# Altium PCB ЦТЕА4.324.039-1.PcbDoc (part 1 of 2)
Units mm, origin at the board's own origin, x right, y up, seen from the top; angles counter-clockwise.
Board outline 257.3 x 114.8 mm, 4 copper layers (Top Layer, Mid-Layer 1, Internal Plane 1, Bottom Layer); 126 components, 114 nets, 540 pads, 161 vias.
Unrouted connection lines stored in the file: 1.
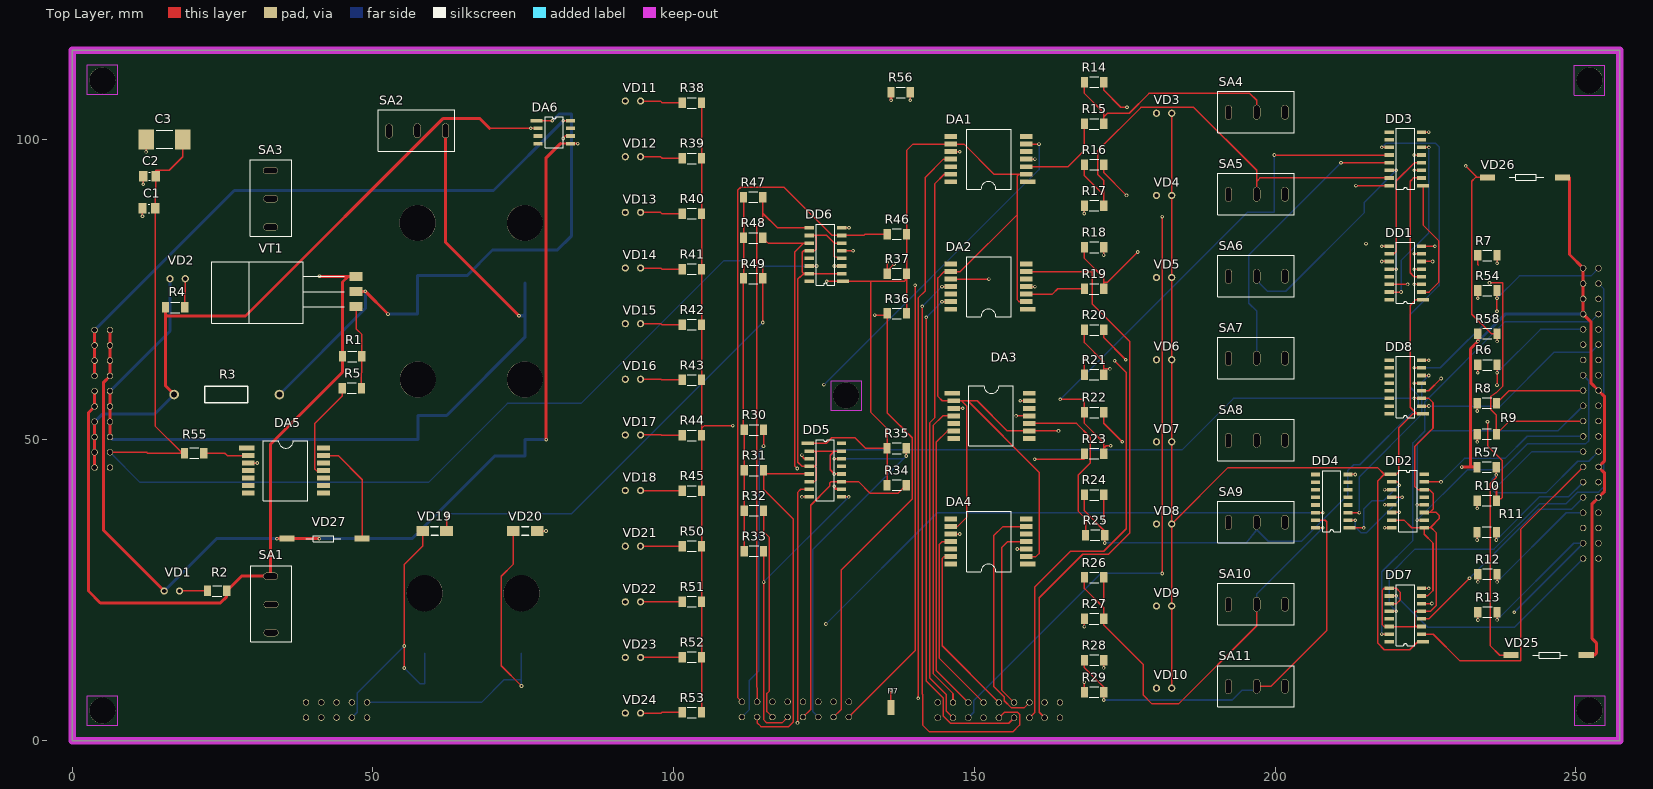
[diagram p0: Top Layer view]
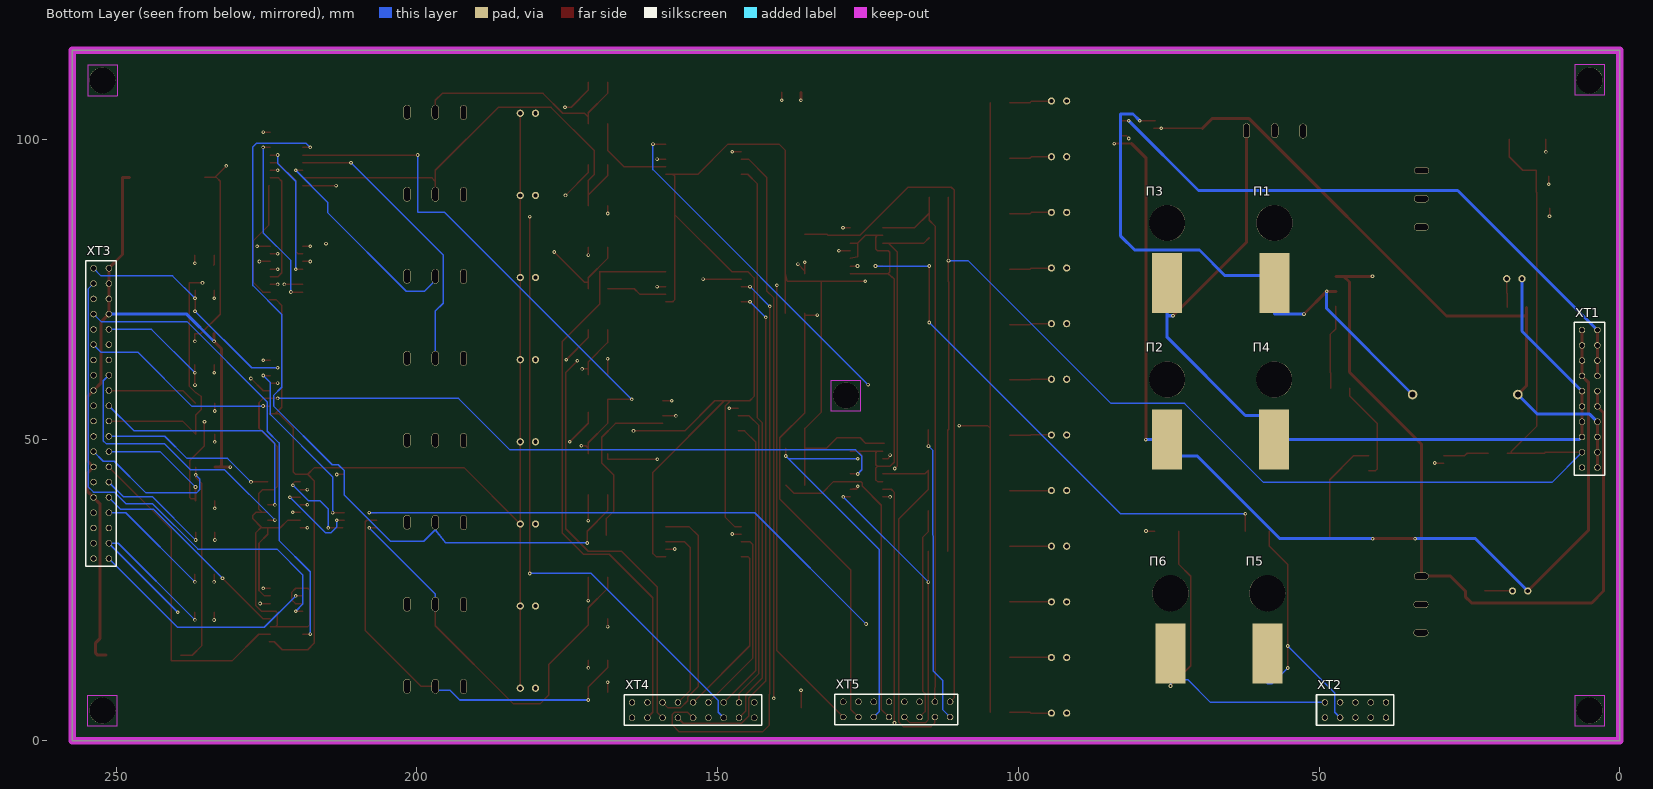
[diagram p1: Bottom Layer view, seen from below]
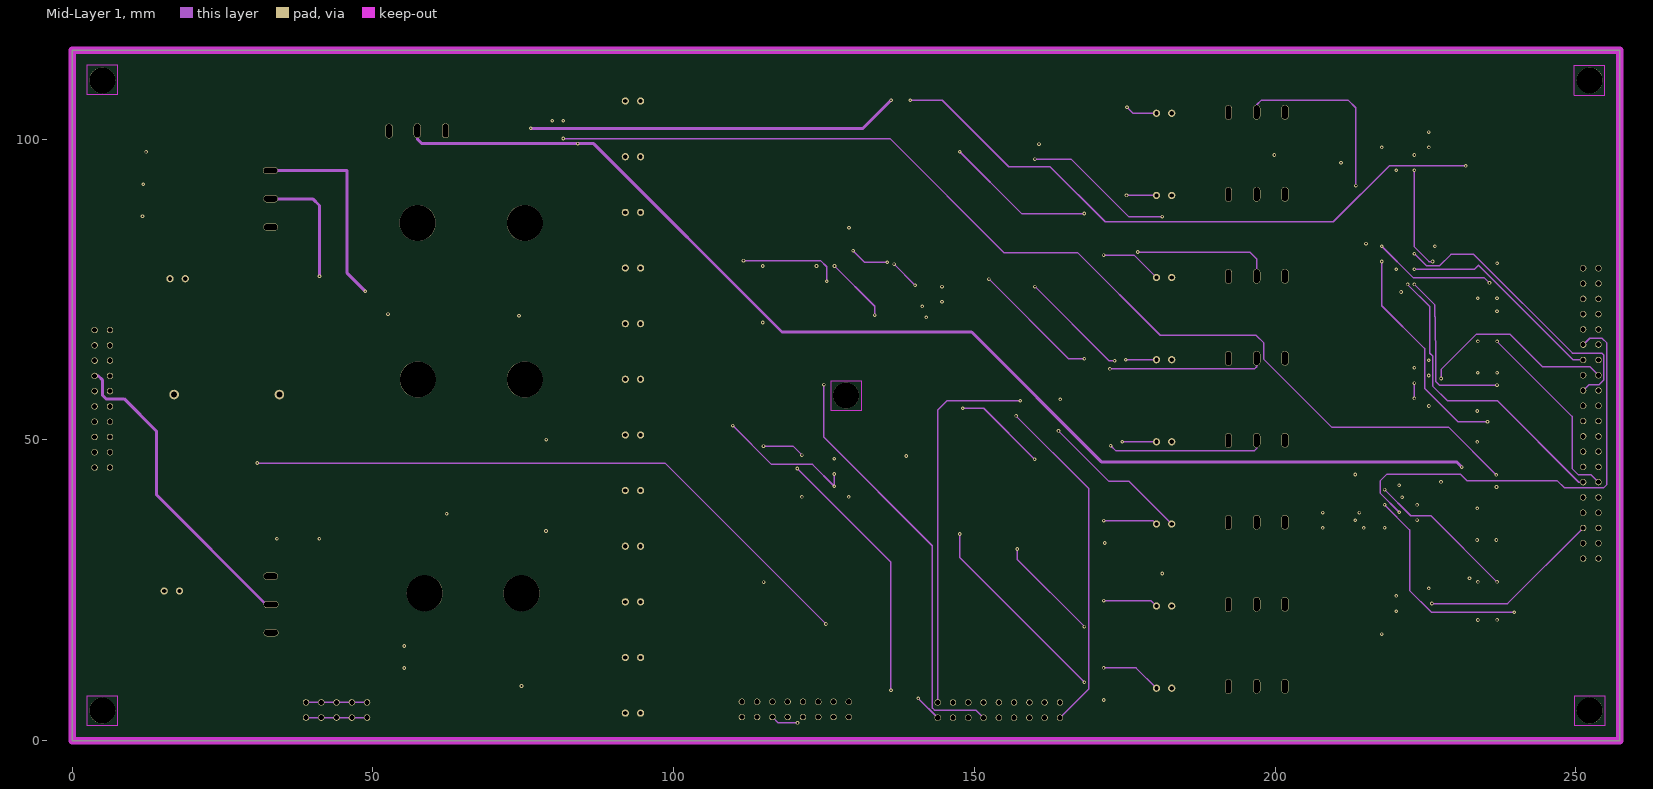
[diagram p2: Mid-Layer 1]
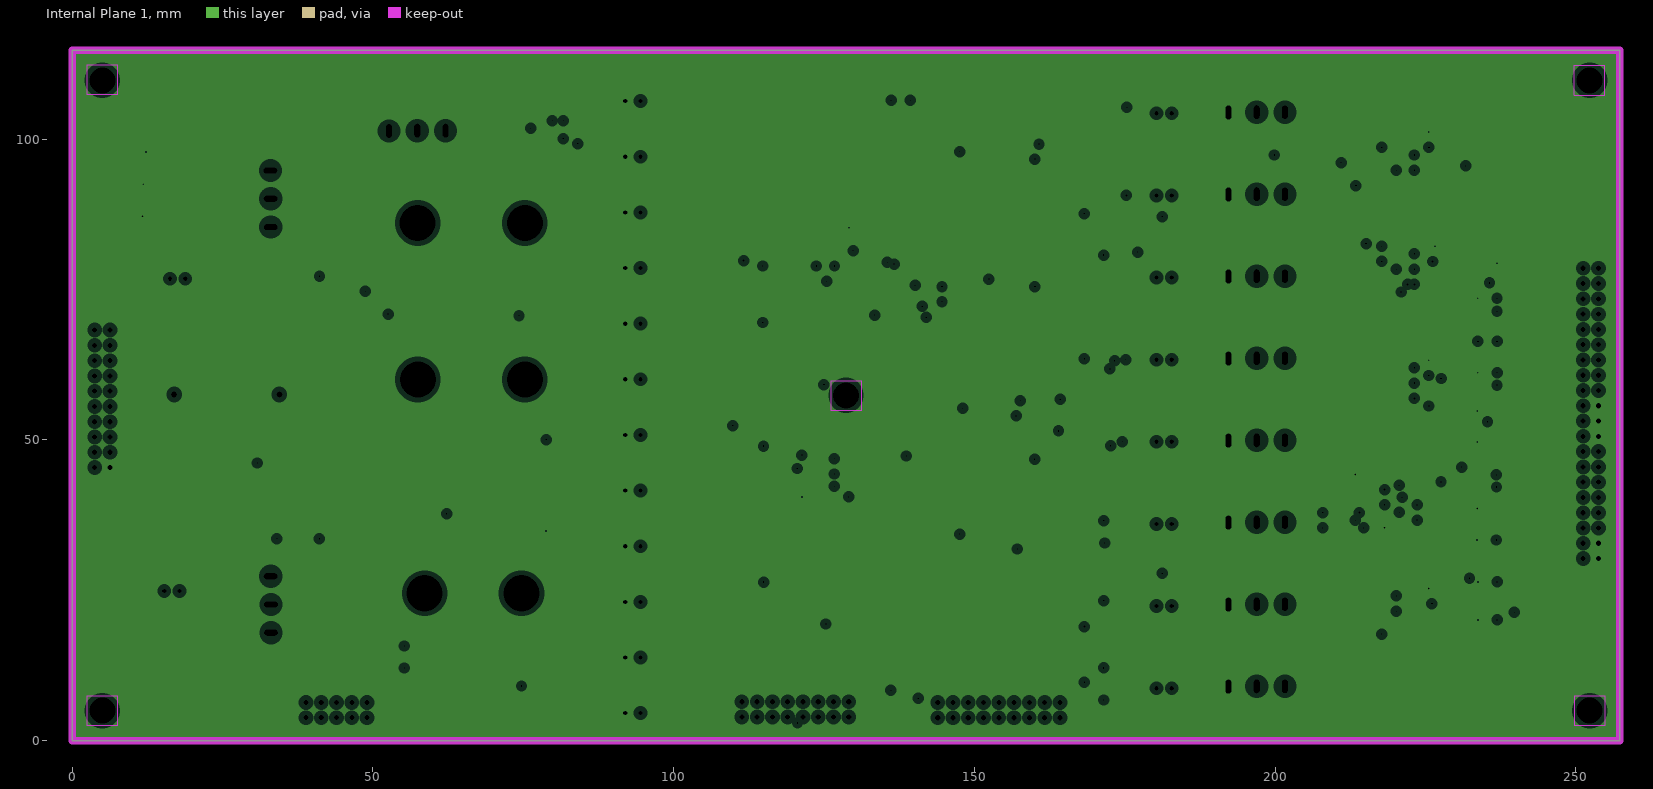
[diagram p3: Internal Plane 1, clearances drawn from the general rule]

## Layer stack, top to bottom
Top Layer: signal copper 0.0356
Dielectric: core 0.32, FR-4, Dk 4.8
Mid-Layer 1: signal copper 0.0356
Dielectric: prepreg 0.32, FR-4, Dk 4.8
Internal Plane 1: plane copper 0.0356, net GND
Dielectric: core 0.32, FR-4, Dk 4.8
Bottom Layer: signal copper 0.0356

## Board outline
0,114.8 0,0 257.3,0 257.3,114.8

## Design rules (kind name [scope] priority, off if disabled: settings)
Clearance [All] p1: gap=0.25
Height [All] p1: minheight=0 maxheight=60 prefheight=12.7
HoleSize [All] p1: absolutevalues=TRUE maxlimit=6 minlimit=0.025 maxpercent=80.000 minpercent=20.000
PlaneClearance [All] p1: clearance=0.8
PlaneConnect [All] p1: planeconnectstyle=Relief reliefexpansion=0.508 reliefentries=4 reliefconductorwidth=0.6 reliefairgap=0.254
PolygonConnect [All] p1: connectstyle=Relief reliefconductorwidth=0.254 reliefentries=4 polygonreliefangle="90 Angle"
RoutingVias [All] p1: holewidth=0.3 width=0.6 viastyle="Through Hole" minholewidth=0.3 minwidth=0.6 maxholewidth=0.3 maxwidth=0.6
SMDNeckDown [All] p1: percent=50.000
SMDToCorner [All] p1: distance=787402
SilkscreenOverComponentPads [All] p1: minsilkscreentomaskgap=0.254
SolderMaskExpansion [All] p1: expansion=0.102
Width +(-)27B [InNetClass('+(-)27В')] p1: maxlimit=0.5 minlimit=0.5 preferedwidth=0.5
Width [All] p2: maxlimit=0.25 minlimit=0.25 preferedwidth=0.25
23 further rules are at their usual default settings.

## Classes and differential pairs
net class +(-)27В: +27В +27В_кам_RS+ +27В_кам_RS- +27В_пульт -27В -27В_камера
component class ЦТЕА4.324.039_Э3_3: DA5 DA6 DD5 DD6 DD7 DD8 R30 R31 R32 R33 R34 R35 R36 R37 R38 R39 R40 R41 R42 R43 R44 R45 R46 R47 R48 R49 R50 R51 R52 R53 R54 R55 R56 R57 R58 VD11 VD12 VD13 VD14 VD15 VD16 VD17 VD18 VD19 VD20 VD21 VD22 VD23 VD24 VD25 VD26 VD27 XT3 XT5 П7
component class ЦТЕА4.324.039_Э3_1: C1 C2 C3 R1 R2 R3 R4 R5 SA1 SA2 SA3 VD1 VD2 VT1 XT1 XT2 П1 П2 П3 П4 П5 П6
component class ЦТЕА4.324.039_Э3_2: DA1 DA2 DA4 DD1 DD3 DD4 R6 R7 R8 R9 R10 R11 R12 R13 R14 R15 R16 R17 R18 R19 R20 R21 R22 R23 R24 R25 R26 R27 R28 R29 SA4 SA5 SA6 SA7 SA8 SA9 SA10 SA11 VD3 VD4 VD5 VD6 VD7 VD8 VD9 VD10 XT4

## Components (designator, comment, footprint, x,y, rotation, side; value= is the part's Value field where it differs from the comment)
C1 "1uF" GRM21BR61E105KA01K 12.727,88.519 r0 top
C2 "1uF" GRM21BR61E105KA01K 12.855,93.855 r0 top
C3 "47uF" TAJV686MO35RNJ 15.327,99.972 r180 top
DA1 "249КП1С" 249KP1S-44_3208_125_12 152.465,96.697 r180 top
DA2 "249КП1С" 249KP1S-44_3208_125_12 152.465,75.502 r180 top
DA3 "249КП1С" 249KP1S-44_3208_125_12 152.715,54.01 r0 top
DA4 "249КП1С" 249KP1S-44_3208_125_12 152.465,33.111 r180 top
DA5 "249КП1С" 249KP1S-44_3208_125_12 35.389,44.915 r0 top
DA6 "MAX4172" MAX4172 80.035,101.183 r0 top
DD1 "Mikroshema" CD4050BD 221.764,77.781 r180 top
DD2 "Mikroshema" CD4050BD 221.989,39.852 r0 top
DD3 "Mikroshema" UL2004AD 221.764,96.745 r180 top
DD4 "Mikroshema" UL2004AD 209.524,39.824 r180 top
DD5 "CD4049" CD4049UBD 125.102,44.984 r0 top
DD6 "CD4049" CD4049UBD 125.353,80.83 r180 top
DD7 "Mikroshema" CD4050BD 221.764,20.887 r180 top
DD8 "Mikroshema" CD4050BD 221.764,58.816 r180 top
R1 "Res" CR1206-JW-8250ELF 44.951,63.893 r0 top
R2 "Res" CR1206-JW-4701ELF 25.681,24.894 r180 top
R3 "Res" KNP100JTB0R1-1_0000_175 16.942,57.56 r0 top
R4 "Res" CR1206-JW-4701ELF 15.503,72.04 r0 top
R5 "Res" CR1206-JW-1001ELF 48.09,58.618 r180 top
R6 "Res" CR1206-JW-3301ELF 233.706,62.481 r0 top
R7 "Res" CR1206-JW-3301ELF 236.907,80.678 r180 top
R8 "Res" CR1206-JW-3301ELF 233.617,56.119 r0 top
R9 "Res" CR1206-JW-3301ELF 233.6,50.98 r0 top
R10 "Res" CR1206-JW-3301ELF 233.61,39.921 r0 top
R11 "Res" CR1206-JW-3301ELF 233.586,34.667 r0 top
R12 "Res" CR1206-JW-3301ELF 233.709,27.712 r0 top
R13 "Res" CR1206-JW-3301ELF 233.709,21.377 r0 top
R14 "Res" CR1206-JW-4700ELF 168.292,109.498 r0 top
R15 "Res" CR1206-JW-3300ELF 171.492,102.551 r180 top
R16 "Res" CR1206-JW-4700ELF 168.292,95.771 r0 top
R17 "Res" CR1206-JW-3300ELF 171.492,88.974 r180 top
R18 "Res" CR1206-JW-4700ELF 168.292,82.045 r0 top
R19 "Res" CR1206-JW-3300ELF 171.492,75.132 r180 top
R20 "Res" CR1206-JW-4700ELF 168.292,68.319 r0 top
R21 "Res" CR1206-JW-3300ELF 171.492,60.876 r180 top
R22 "Res" CR1206-JW-4700ELF 168.292,54.593 r0 top
R23 "Res" CR1206-JW-3300ELF 171.492,47.73 r180 top
R24 "Res" CR1206-JW-4700ELF 168.292,40.868 r0 top
R25 "Res" CR1206-JW-3300ELF 171.673,34.18 r180 top
R26 "Res" CR1206-JW-4700ELF 168.292,27.14 r0 top
R27 "Res" CR1206-JW-3300ELF 171.492,20.277 r180 top
R28 "Res" CR1206-JW-4700ELF 168.292,13.414 r0 top
R29 "Res" CR1206-JW-3300ELF 171.492,8.069 r180 top
R30 "Res" CR1206-JW-3301ELF 111.738,51.692 r0 top
R31 "Res" CR1206-JW-3301ELF 111.738,44.966 r0 top
R32 "Res" CR1206-JW-3301ELF 111.738,38.24 r0 top
R33 "Res" CR1206-JW-3301ELF 111.738,31.514 r0 top
R34 "Res" CR1206-JW-3301ELF 135.471,42.506 r0 top
R35 "Res" CR1206-JW-3301ELF 135.471,48.626 r0 top
R36 "Res" CR1206-JW-3301ELF 138.717,71.038 r180 top
R37 "Res" CR1206-JW-3301ELF 138.717,77.639 r180 top
R38 "Res" CR1206-JW-4700ELF 104.628,106.051 r180 top
R39 "Res" CR1206-JW-4700ELF 104.628,96.837 r180 top
R40 "Res" CR1206-JW-4700ELF 104.628,87.623 r180 top
R41 "Res" CR1206-JW-4700ELF 104.628,78.409 r180 top
R42 "Res" CR1206-JW-4700ELF 104.628,69.194 r180 top
R43 "Res" CR1206-JW-4700ELF 104.628,59.98 r180 top
R44 "Res" CR1206-JW-4700ELF 104.628,50.766 r180 top
R45 "Res" CR1206-JW-4700ELF 104.628,41.552 r180 top
R46 "Res" CR1206-JW-3301ELF 138.717,84.24 r180 top
R47 "Res" CR1206-JW-3301ELF 111.616,90.388 r0 top
R48 "Res" CR1206-JW-3301ELF 111.616,83.622 r0 top
R49 "Res" CR1206-JW-3301ELF 111.616,76.856 r0 top
R50 "Res" CR1206-JW-4700ELF 104.628,32.337 r180 top
R51 "Res" CR1206-JW-4700ELF 104.628,23.123 r180 top
R52 "Res" CR1206-JW-4700ELF 104.628,13.909 r180 top
R53 "Res" CR1206-JW-4700ELF 104.628,4.695 r180 top
R54 "Res" CR1206-JW-4701ELF 236.889,74.857 r180 top
R55 "Res" CR1206-JW-3300ELF 18.677,47.811 r0 top
R56 "Res" CR1206-JW-4701ELF 136.147,107.795 r0 top
R57 "Res" CR1206-JW-1001ELF 233.584,45.497 r0 top
R58 "Res" CR1206-JW-4700ELF 236.909,67.701 r180 top
SA1 "\"Питание пульта\"" 7107SYZQE 33.049,17.953 r0 top
SA2 "\"Измерение тока\"" 7107SYZQE 62.062,101.423 r90 top
SA3 "\"Питание камеры\"" 7107SYZQE 32.993,85.402 r0 top
SA4 "\"1\"" 7107SYZQE 201.635,104.501 r90 top
SA5 "\"2\"" 7107SYZQE 201.635,90.864 r90 top
SA6 "\"3\"" 7107SYZQE 201.635,77.227 r90 top
SA7 "\"4\"" 7107SYZQE 201.635,63.59 r90 top
SA8 "\"5\"" 7107SYZQE 201.635,49.953 r90 top
SA9 "\"6\"" 7107SYZQE 201.635,36.316 r90 top
SA10 "\"7\"" 7107SYZQE 201.635,22.679 r90 top
SA11 "\"8\"" 7107SYZQE 201.635,9.041 r90 top
VD1 "LED" HLMP-D150 17.826,24.9 r180 top
VD2 "LED" HLMP-D150 18.788,76.813 r180 top
VD3 "\"Out1\"" HLMP-D150 182.806,104.326 r180 top
VD4 "\"Out2\"" HLMP-D150 182.806,90.668 r180 top
VD5 "\"Out3\"" HLMP-D150 182.806,77.011 r180 top
VD6 "\"Out4\"" HLMP-D150 182.806,63.354 r180 top
VD7 "\"Out5\"" HLMP-D150 182.806,49.697 r180 top
VD8 "\"Out6\"" HLMP-D150 182.806,36.04 r180 top
VD9 "\"Out7\"" HLMP-D150 182.806,22.383 r180 top
VD10 "\"Out8\"" HLMP-D150 182.806,8.726 r180 top
VD11 "\"1\"" HLMP-D150 94.499,106.35 r180 top
VD12 "\"2\"" HLMP-D150 94.499,97.098 r180 top
VD13 "\"3\"" HLMP-D150 94.499,87.847 r180 top
VD14 "\"4\"" HLMP-D150 94.499,78.595 r180 top
VD15 "\"5\"" HLMP-D150 94.499,69.344 r180 top
VD16 "\"6\"" HLMP-D150 94.499,60.092 r180 top
VD17 "\"7\"" HLMP-D150 94.499,50.841 r180 top
VD18 "\"8\"" HLMP-D150 94.499,41.589 r180 top
VD19 "Schottky" 10MQ060N 60.26,34.867 r180 top
VD20 "Schottky" 10MQ060N 75.317,34.867 r0 top
VD21 "\"9\"" HLMP-D150 94.499,32.338 r180 top
VD22 "\"10\"" HLMP-D150 94.499,23.086 r180 top
VD23 "\"11\"" HLMP-D150 94.499,13.835 r180 top
VD24 "\"КПС\"" HLMP-D150 94.499,4.583 r180 top
VD25 "9В" 1N4754A-25_0000_145_18 245.483,14.21 r180 top
VD26 "9В" 1N4754A-25_0000_145_18 241.544,93.663 r180 top
VD27 "9В" 1N4754A-25_0000_145_18 41.955,33.587 r0 top
VT1 "IRF4905PBF" IRF4905PBF-f1 47.198,72.21 r90 top
XT1 "1 +27В" PLD-20 3.726,68.277 r270 bottom
XT2 "1 КПС-1" PLD-10 38.862,3.829 r0 bottom
XT3 "1 Общ" PLD-40 251.224,78.547 r270 bottom
XT4 "1 opt_out1+" PLD-18 143.901,3.819 r0 bottom
XT5 "1 ТМ1" PLD-16 111.335,3.928 r0 bottom
П1 "\"+U_кам\"" ZMP 57.422,86.077 r180 bottom
П2 "\"-I_кам\"" ZMP 75.245,60.064 r180 bottom
П3 "\"-U_кам.\"" ZMP 75.245,86.077 r180 bottom
П4 "\"+I_кам.\"" ZMP 57.452,60.064 r180 bottom
П5 "\"КПС-1\"" ZMP 58.591,24.51 r180 bottom
П6 "\"КПС-2\"" ZMP 74.694,24.51 r180 bottom
П7 "" Pad 136.126,5.504 r0 top

## Footprints (in the part's own frame and the unit in brackets; to place one, negate y for a bottom-side part, rotate by r counter-clockwise, add the part's x,y. Pads: shape width x height; smd on the part's side, far side on the other; paste and mask are expansions set on the pad)
1N4754A-25_0000_145_18 [mm] "Диод 1N4754A. Diodes INCORPORATED.  Формовка 25.0000.145.12 по ОСТ92-9388-98.Класс точности 3"
  rect 2.5x1 smd: 1(-6.25,0) 2(6.25,0)
  silkscreen extent -3.1,-0.5 2.65,0.5
10MQ060N [mm] "Диод 10MQ060N.International Rectifier. Класс точности 3"
  rect 2.1x1.7 smd: 1(-1.975,0) 2(1.975,0)
  silkscreen extent -0.6,-0.71 0.61,0.73
249KP1S-44_3208_125_12 [mm] "Микросхема 249КП1С, 1Х3.438.000 ТУ. Формовка 44.3208.125.12 по ОСТ92-9388-98. Класс точности 3."
  rect 2.6x0.8 smd: 1(-6.375,3.75)
  rect 2.1x0.8 smd: 2(-6.125,2.5) 3(-6.125,1.25) 4(-6.125,0) 5(-6.125,-1.25) 6(-6.125,-2.5) 7(-6.125,-3.75) 8(6.375,-3.75) 9(6.375,-2.5) 10(6.375,-1.25) 11(6.375,0) 12(6.375,1.25) 13(6.375,2.5) 14(6.375,3.75)
  silkscreen extent -3.67,-5 3.77,5
7107SYZQE [mm] "Переключатель 7107SYZQE. ITT Cannon Класс точности 3"
  rrect100% 2.45x1.2 hole 0.95 slot 2.25 at 0 deg: 1(0,0) 2(0,4.7) 3(-0.05,9.4)
  silkscreen extent -3.4,-1.52 3.46,11.18
CD4049UBD [mm] "Микросхема CD4049UBDTexas Instrument. Класс точности 3."
  rect 2x0.6 smd: 1(-2.812,4.445)
  rect 1.55x0.6 smd: 2(-2.588,3.175) 3(-2.588,1.905) 4(-2.588,0.635) 5(-2.588,-0.635) 6(-2.588,-1.905) 7(-2.588,-3.175) 8(-2.588,-4.445) 9(2.813,-4.445) 10(2.813,-3.175) 11(2.813,-1.905) 12(2.813,-0.635) 13(2.813,0.635) 14(2.813,1.905) 15(2.813,3.175) 16(2.813,4.445)
  silkscreen extent -1.41,-5.08 1.61,5.08
CD4050BD [mm] "Микросхема CD4050BDTexas Instrument. Класс точности 3."
  rect 2x0.6 smd: 1(-2.813,4.445)
  rect 1.55x0.6 smd: 2(-2.588,3.175) 3(-2.588,1.905) 4(-2.588,0.635) 5(-2.588,-0.635) 6(-2.588,-1.905) 7(-2.588,-3.175) 8(-2.588,-4.445) 9(2.812,-4.445) 10(2.812,-3.175) 11(2.812,-1.905) 12(2.812,-0.635) 13(2.812,0.635) 14(2.812,1.905) 15(2.812,3.175) 16(2.812,4.445)
  silkscreen extent -1.41,-5.08 1.61,5.08
CR1206-JW-1001ELF [mm] "Резистор CR1206-JW-1001ELF. Bourns. Класс точности 3"
  rect 1.2x1.75 smd: 1(0,0) 2(3.2,0)
  silkscreen extent 0.85,-0.88 2.38,0.87
CR1206-JW-3300ELF [mm] "Резистор CR1206-JW-3300ELF. Bourns. Класс точности 3"
  rect 1.2x1.75 smd: 1(0,0) 2(3.2,0)
  silkscreen extent 0.85,-0.87 2.38,0.88
CR1206-JW-3301ELF [mm] "Резистор CR1206-JW-3301ELF. Bourns. Класс точности 3"
  rect 1.2x1.75 smd: 1(0,0) 2(3.2,0)
  silkscreen extent 0.85,-0.87 2.37,0.88
CR1206-JW-4700ELF [mm] "Резистор CR1206-JW-4700ELF. Bourns. Класс точности 3"
  rect 1.2x1.75 smd: 1(0,0) 2(3.2,0)
  silkscreen extent 0.85,-0.87 2.37,0.87
CR1206-JW-4701ELF [mm] "Резистор CR1206-JW-4701ELF. Bourns. Класс точности 3"
  rect 1.2x1.75 smd: 1(0,0) 2(3.2,0)
  silkscreen extent 0.85,-0.88 2.37,0.88
CR1206-JW-8250ELF [mm] "Резистор CR1206-JW-8250ELF. Bourns. Класс точности 3"
  rect 1.2x1.75 smd: 1(0,0) 2(3.2,0)
  silkscreen extent 0.85,-0.88 2.38,0.87
GRM21BR61E105KA01K [mm] "Конденсатор GRM21BR61E105KA01K. MURATA. Класс точности 3."
  rect 1.4x1.8 smd: 1(-1.05,0) 2(1.05,0)
  silkscreen extent -0.13,-0.7 0.15,0.68
HLMP-D150 [mm] "Светодиод HLMP-D150. Avago TECHNOLOGIES. Класс точноти 3"
  round 1.2 hole 0.7: 1(0,0) 2(2.54,0)
IRF4905PBF-f1 [mm] "Транзистор IRF 4905 PBF, ПАКБ 432149.017ТУ. Формовка по чертежу, класс точности 3"
  rect 1.5x2.2 smd: 1(0,0) 2(2.5,0) 3(5,0)
  silkscreen extent -2.83,1.95 7.45,23.98
KNP100JTB0R1-1_0000_175 [mm] "Резистор KNP100JTB0R1 Hitano Enterprise. Формовка 1.0000.175по ОСТ92-9388-98.Класс точности 3"
  round 1.6 hole 1: 1(0,0) 2(17.5,0)
  silkscreen extent 5.1,-1.35 12.27,1.35
MAX4172 [mm] "Микросхема MAX4172 Класс точности 3."
  rect 2x0.6 smd: 1(-2.812,1.905)
  rect 1.55x0.6 smd: 2(-2.587,0.635) 3(-2.587,-0.635) 4(-2.587,-1.905) 5(2.813,-1.905) 6(2.813,-0.635) 7(2.813,0.635) 8(2.813,1.905)
  silkscreen extent -1.41,-2.62 1.61,2.54
Pad [mm] "контактная площадка. Класс точности 3"
  rect 1.1x2.5 smd: 1(0,0)
PLD-10 [mm] "Разьем штырьевой PLD-10.Connfly electronic. Класс точности 3."
  round 1.05 hole 0.85: 1(0,0) 2(2.54,0) 3(5.08,0) 4(7.62,0) 5(10.16,0) 6(0,-2.54) 7(2.54,-2.54) 8(5.08,-2.54) 9(7.62,-2.54) 10(10.16,-2.54)
  silkscreen extent -1.27,-3.81 11.56,1.27
PLD-16 [mm] "разьем штырьевой PLD-16. Connfly electronic. Класс точности 3"
  round 1.05 hole 0.85: 1(0,0) 2(2.54,0) 3(5.08,0) 4(7.62,0) 5(10.16,0) 6(12.7,0) 7(15.24,0) 8(17.78,0) 9(0,-2.54) 10(2.54,-2.54) 11(5.08,-2.54) 12(7.62,-2.54) 13(10.16,-2.54) 14(12.7,-2.54) 15(15.24,-2.54) 16(17.78,-2.54)
  silkscreen extent -1.27,-3.81 19.18,1.27
PLD-18 [mm] "Разьем штырьевой PLD-18. Connfly electronic. Класс точности 3."
  round 1.05 hole 0.85: 1(0,0) 2(2.54,0) 3(5.08,0) 4(7.62,0) 5(10.16,0) 6(12.7,0) 7(15.24,0) 8(17.78,0) 9(20.32,0) 10(0,-2.54) 11(2.54,-2.54) 12(5.08,-2.54) 13(7.62,-2.54) 14(10.16,-2.54) 15(12.7,-2.54) 16(15.24,-2.54) 17(17.78,-2.54) 18(20.32,-2.54)
  silkscreen extent -1.27,-3.81 21.59,1.27
PLD-20 [mm] "Разьем штырьевой PLD-20.Connfly electronic. Класс точности 3."
  round 1.05 hole 0.85: 1(0,0) 2(2.54,0) 3(5.08,0) 4(7.62,0) 5(10.16,0) 6(12.7,0) 7(15.24,0) 8(17.78,0) 9(20.32,0) 10(22.86,0) 11(0,-2.54) 12(2.54,-2.54) 13(5.08,-2.54) 14(7.62,-2.54) 15(10.16,-2.54) 16(12.7,-2.54) 17(15.24,-2.54) 18(17.78,-2.54) 19(20.32,-2.54) 20(22.86,-2.54)
  silkscreen extent -1.27,-3.81 24.13,1.27
PLD-40 [mm] "Разьем штырьевой PLD-40.Connfly electronic. Класс точности 3."
  round 1.05 hole 0.85: 1(0,0) 2(2.54,0) 3(5.08,0) 4(7.62,0) 5(10.16,0) 6(12.7,0) 7(15.24,0) 8(17.78,0) 9(20.32,0) 10(22.86,0) 12(27.94,0) 13(30.48,0) 14(33.02,0) 15(35.56,0) 16(38.1,0) 17(40.64,0) 18(43.18,0) 19(45.72,0) 20(48.26,0) 21(0,-2.54) 22(2.54,-2.54) 23(5.08,-2.54) 24(7.62,-2.54) 25(10.16,-2.54) 26(12.7,-2.54) 27(15.24,-2.54) 28(17.78,-2.54) 29(20.32,-2.54) 30(22.86,-2.54) 31(25.4,-2.54) 32(27.94,-2.54) 33(30.48,-2.54) 34(33.02,-2.54) 35(35.56,-2.54) 36(38.1,-2.54) 37(40.64,-2.54) 38(43.18,-2.54) 39(45.72,-2.54) 40(48.26,-2.54)
  round 1.05 hole 0.85 unplated: 11(25.4,0)
  silkscreen extent -1.27,-3.81 49.53,1.27
TAJV686MO35RNJ [mm] "Конденсатор TAJV686MO35RNJ.AVX. Класс точности 3."
  rect 2.6x3.3 smd: 1(-3.05,0) 2(3.05,0)
  silkscreen extent -1.35,-1.5 1.33,1.5
UL2004AD [mm] "Микросхема UL2004AD Класс точности 3."
  rect 2x0.6 smd: 1(-2.813,4.445)
  rect 1.55x0.6 smd: 2(-2.588,3.175) 3(-2.588,1.905) 4(-2.588,0.635) 5(-2.588,-0.635) 6(-2.588,-1.905) 7(-2.588,-3.175) 8(-2.588,-4.445) 9(2.812,-4.445) 10(2.812,-3.175) 11(2.812,-1.905) 12(2.812,-0.635) 13(2.812,0.635) 14(2.812,1.905) 15(2.812,3.175) 16(2.812,4.445)
  silkscreen extent -1.41,-5.08 1.61,5.08
ZMP [mm] "Зажим малогабаритный ЗМП, ГА0.483.000 ТУ. Класс точности 3."
  rect 5x10 smd: 1(0,-10)
  round 6 hole 6: 2(0,0)

## Part data
C1 C2 C3: library part Condensator
DA1 DA2 DA3 DA4 DA5: library part Microshema
DD1 DD2 DD7 DD8: "CD4050BD"
DD3 DD4: "ULN2004"
DD5 DD6: library part Mikroshema
R1 R2 R3 R4 R5 R6 R7 R8 R9 R10 R11 R12 R13 R14 R15 R16 R17 R18 R19 R20 R21 R22 R23 R24 R25 R26 R27 R28 R29 R30 R31 R32 R33 R34 R35 R36 R37 R38 R39 R40 R41 R42 R43 R44 R45 R46 R47 R48 R49 R50 R51 R52 R53 R54 R55 R56 R57 R58: library part Rezistor
SA1 SA2 SA3 SA4 SA5 SA6 SA7 SA8 SA9 SA10 SA11: library part Perekljuchatel
VD1 VD2 VD3 VD4 VD5 VD6 VD7 VD8 VD9 VD10 VD11 VD12 VD13 VD14 VD15 VD16 VD17 VD18 VD21 VD22 VD23 VD24: library part Svetodiod
VD19 VD20: library part Diod
VD25 VD26 VD27: library part Diod, "zener"
VT1: library part MOSFET-P, "MOSFET"
XT1 XT2 XT3 XT4: library part "Razem shtyrevoj"
XT5: library part "Razem shtyrevoj", "PLD16"
П1 П2 П3 П4 П5 П6: library part "Zazhim malogobaritnyj", "pad_ЗМП"
П7: library part Pad, "pad"

## Free pads (board coordinates)
  round 4.3 hole 4.3: 1(5,5) 1(5,109.8) 1(128.65,57.4) 1(252.3,5) 1(252.3,109.8)

## Via types
v1: diameter 0.6, hole 0.3, Top Layer to Bottom Layer, 161 vias

## Nets (pads, with @x,y where several pads share a name; then routed paths per layer and width w, separated by ;. In a path a pad name is that pad's centre, name@x,y a point inside that pad or via, vN(x,y) a via of type N, cw(c..) or ccw(c..) an arc to the next point about the centre after c; other vN are vias at no path point)
+5V: C1.2 C2.2 C3.1 DA1.2 DA1.9 DA2.2 DA2.9 DA3.2 DA3.9 DA4.2 DA4.9 DD1.1 DD2.1 DD5.1 DD6.1 DD7.1 DD8.1 R30.1 R31.1 R32.1 R33.1 R34.1 R35.1 R36.1 R37.1 R46.1 R47.1 R48.1 R49.1 R55.1 VD3.1 VD4.1 VD5.1 VD6.1 VD7.1 VD8.1 VD9.1 VD10.1 XT1.19 | length 752.9
  Top Layer w0.25: XT1.19@6.266,47.957 12.383,47.957 12.529,47.811 18.048,47.811 ; C3.1@18.377,99.972 18.377,97.099 16.114,94.836 13.905,94.836 C2.2@13.905,93.855 13.905,91.233 13.777,91.105 C1.2@13.777,88.519 13.777,52.348 18.048,48.077 18.048,47.811 ; R55.1@18.677,47.811 18.048,47.811 ; R47.1@111.616,90.388 R48.1@111.616,83.622 v1(111.616,79.827) R49.1@111.616,76.856 111.616,76.296 111.596,76.277 111.596,51.692 R30.1@111.738,51.692 R31.1@111.738,44.966 R32.1@111.738,38.24 R33.1@111.738,31.514 ; DD5.1@122.289,49.429 125.363,49.429 126.297,50.363 130.157,50.363 131.91,48.61 R35.1@135.471,48.61 ; v1(125.439,76.385) DD6.1@128.165,76.385 132.729,76.385 ; R34.1@135.471,42.506 R35.1@135.471,48.61 ; R36.1@138.717,71.038 138.717,76.709 ; DA4.9@146.09,35.611 147.181,35.611 148.756,37.186 148.756,55.595 147.841,56.51 ; DA4.2@158.59,30.611 160.237,30.611 160.745,31.119 160.745,44.648 148.883,56.51 ; DA2.2@158.59,73.002 157.443,73.002 157.163,73.281 157.163,87.501 ; DA1.2@158.59,94.197 157.443,94.197 ; v1(163.98,51.51) DA3.9@159.09,51.51 155.458,51.51 150.458,56.51 148.883,56.51 ; VD10.1@182.806,8.726 VD9.1@182.806,22.383 VD8.1@182.806,36.04 ; VD3.1@182.806,104.326 VD4.1@182.806,90.668 VD5.1@182.806,77.011 VD6.1@182.806,63.354 VD7.1@182.806,49.697 VD8.1@182.806,36.04 ; DD7.1@224.576,16.442 223.711,16.442 222.403,15.133 218.149,15.133 217.057,16.225 217.057,43.204 218.149,44.297 ; DD8.1@224.576,54.371 223.539,54.371 ; DD1.1@224.576,73.336 223.443,73.336 222.467,72.359 222.467,55.443 223.539,54.371 ; 132.729,76.385 138.393,76.385 ; 132.729,76.385 132.729,54.655 135.471,51.912 R35.1@135.471,48.626 R35.1@135.471,48.61 ; 138.393,76.385 138.717,76.709 ; 138.393,76.385 R37.1@138.717,77.639 ; 138.717,76.709 R37.1@138.717,77.639 ; R37.1@138.717,77.639 R46.1@138.717,84.24 138.717,98.115 139.798,99.197 DA1.9@146.09,99.197 148.248,99.197 153.248,94.197 157.443,94.197 ; 147.841,56.51 DA3.2@146.59,56.51 144.667,56.51 143.93,57.247 143.93,76.935 144.997,78.002 DA2.9@146.09,78.002 147.664,78.002 157.163,87.501 ; 147.841,56.51 148.883,56.51 ; 157.163,87.501 157.163,93.917 157.443,94.197 ; VD8.1@182.806,36.04 192.176,45.41 217.035,45.41 218.149,44.297 ; 218.149,44.297 DD2.1@219.176,44.297 220.181,44.297 220.587,44.703 220.587,52.039 222.919,54.371 223.539,54.371
  Mid-Layer 1 w0.25: v1(111.616,79.827) 124.423,79.827 125.439,78.811 v1(125.439,76.385) ; v1(163.98,51.51) 172.391,43.099 175.747,43.099 VD8.1@182.806,36.04
  Bottom Layer w0.25: XT1.19@6.266,47.957 11.277,42.946 59.221,42.946 72.353,56.078 84.596,56.078 108.345,79.827 v1(111.616,79.827)
+27В: DA6.8 SA1.2 XT1.1 XT1.2 XT1.3 XT1.4 | length 153.9
  Top Layer w0.3: v1(81.649,103.088) DA6.8@82.847,103.088
  Top Layer w0.5: XT1.4@3.726,60.657 XT1.3@3.726,63.197 XT1.2@3.726,65.737 XT1.1@3.726,68.277
  Mid-Layer 1 w0.5: XT1.4@3.726,60.657 4.35,60.657 4.992,60.015 4.992,57.475 5.627,56.84 8.624,56.84 14.034,51.43 14.034,40.84 32.221,22.653 SA1.2@33.049,22.653
  Bottom Layer w0.5: XT1.1@3.726,68.277 26.935,91.486 70.046,91.486 v1(81.649,103.088)
+27В_кам_RS+: DA6.1 R3.2 SA3.3 VT1.2 П1.1 | length 131.7
  Top Layer w0.3: DA6.1@77.222,103.088 v1(79.795,103.088)
  Top Layer w0.5: v1(48.731,74.722) v1@48.725,74.716 ; v1(52.504,70.937) v1@48.725,74.716 ; v1@48.725,74.716 48.72,74.71 VT1.2@47.198,74.71 v1@48.725,74.716
  Mid-Layer 1 w0.5: SA3.3@32.943,94.802 45.719,94.802 45.719,77.733 v1(48.731,74.722)
  Bottom Layer w0.5: R3.2@34.442,57.56 48.731,71.848 v1(48.731,74.722) ; v1(52.504,70.937) 57.422,70.937 П1.1@57.422,76.077 57.422,77.312 65.622,77.312 69.889,81.58 80.659,81.58 82.97,83.891 82.97,104.191 82.95,104.211 80.918,104.211 v1(79.795,103.088)
+27В_кам_RS-: DA6.2 R3.1 R4.1 R56.1 XT1.7 XT1.8 XT1.9 XT1.10 | length 177.3
  Top Layer w0.3: 69.361,101.818 v1@76.244,101.818 ; v1(76.239,101.823) v1@76.244,101.818 ; DA6.2@77.447,101.818 v1@76.244,101.818
  Top Layer w0.5: XT1.10@3.726,45.417 XT1.9@3.726,47.957 XT1.8@3.726,50.497 XT1.7@3.726,53.037 ; R4.1@15.503,72.04 15.503,70.937 ; R3.1@16.942,57.56 15.503,58.999 15.503,70.937 ; 69.361,101.818 67.705,103.474 61.685,103.474 28.817,70.607 15.833,70.607 15.503,70.937 ; v1(136.147,106.497) R56.1@136.147,107.795
  Mid-Layer 1 w0.5: v1(76.239,101.823) 131.473,101.823 v1(136.147,106.497)
  Bottom Layer w0.5: XT1.7@3.726,53.037 4.99,54.3 13.682,54.3 R3.1@16.942,57.56
+27В_пульт: R1.1 R2.1 SA1.3 SA3.2 VT1.3 XT1.5 XT1.6 | length 148.8
  Top Layer w0.5: XT1.5@3.726,58.117 XT1.6@3.726,55.577 2.681,54.531 2.681,24.887 4.674,22.893 24.627,22.893 25.681,23.947 R2.1@25.681,24.894 28.14,27.353 SA1.3@32.983,27.353 ; SA1.3@32.999,27.353 SA1.3@32.983,27.353 ; v1(41.111,77.21) 45.89,77.21 ; VT1.3@47.198,77.21 45.89,77.21 ; SA1.3@32.983,27.353 32.983,49.317 44.951,61.285 R1.1@44.951,63.893 44.951,76.271 45.89,77.21
  Mid-Layer 1 w0.5: SA3.2@32.992,90.102 39.98,90.102 41.111,88.971 v1(41.111,77.21)
-27В: DA6.5 R57.1 R58.2 SA2.2 VD1.2 VD25.1 VD26.1 VD27.1 XT1.11 XT1.12 XT1.13 XT1.14 XT3.1 XT3.2 XT3.3 XT3.4 XT3.29 XT3.34 XT3.36 П2.1 | length 531.4
  Top Layer w0.3: 81.141,99.278 DA6.5@82.847,99.278 v1(84.049,99.278)
  Top Layer w0.5: XT1.11@6.266,68.277 XT1.12@6.266,65.737 XT1.13@6.266,63.197 XT1.14@6.266,60.657 5.221,59.611 5.221,34.965 VD1.2@15.286,24.9 ; v1(34.028,33.587) VD27.1@35.705,33.587 v1(41.099,33.587) ; v1(78.804,50.064) 78.804,96.942 81.141,99.278 ; v1(231.022,45.497) 232.794,45.497 ; R57.1@233.584,45.497 232.794,45.497 ; R58.2@233.709,67.701 v1@233.709,66.4 ; v1(233.719,66.39) v1@233.709,66.4 ; VD26.1@247.794,93.663 248.934,93.663 248.934,80.837 XT3.1@251.224,78.547 XT3.2@251.224,76.007 XT3.3@251.224,73.467 XT3.4@251.224,70.927 252.49,69.661 252.49,59.501 XT3.29@253.764,58.227 254.801,57.19 254.801,46.564 XT3.34@253.764,45.527 254.801,44.49 254.801,41.484 XT3.36@253.764,40.447 252.718,39.402 252.718,16.962 253.41,16.27 253.41,14.549 253.071,14.21 VD25.1@251.733,14.21 ; 232.794,45.497 232.5,45.791 232.5,65.155 233.709,66.365 v1@233.709,66.4
  Mid-Layer 1 w0.5: SA2.2@57.362,101.423 57.362,100.051 58.134,99.278 ; v1(84.049,99.278) 58.134,99.278 ; v1(231.022,45.497) 230.144,46.375 171.108,46.375 149.543,67.94 118.022,67.94 86.704,99.258 84.049,99.26 58.134,99.278
  Bottom Layer w0.5: VD1.2@15.286,24.9 23.973,33.587 v1(34.028,33.587) ; v1(41.099,33.587) 56.491,33.587 70.27,47.366 75.245,47.366 П2.1@75.245,50.064 v1(78.804,50.064) ; v1(233.719,66.39) 238.256,70.927 XT3.4@251.224,70.927
-27В_камера: SA2.1 VD2.2 XT1.15 XT1.16 XT1.17 XT1.18 П3.1 П4.1 | length 154.9
  Top Layer w0.5: XT1.18@6.266,50.497 XT1.17@6.266,53.037 XT1.16@6.266,55.577 XT1.15@6.266,58.117 ; SA2.1@62.062,101.423 62.062,82.879 v1(74.283,70.658)
  Bottom Layer w0.5: XT1.18@6.266,50.497 6.699,50.064 П4.1@57.452,50.064 57.452,54.071 62.244,54.071 75.245,67.073 75.245,70.937 ; XT1.15@6.266,58.117 16.248,68.099 VD2.2@16.248,76.813 ; v1(74.283,70.658) 74.965,70.658 75.245,70.937 ; П3.1@75.245,76.077 75.245,70.937
CAM_POWER: DA5.11 R5.2 | length 16.9
  Top Layer w0.25: DA5.11@41.764,44.915 40.603,44.915 40.323,45.194 40.323,52.756 44.89,57.323 R5.2@44.89,58.618
GND: C1.1 C2.1 C3.2 DD1.8 DD2.8 DD3.8 DD4.8 DD5.8 DD6.8 DD7.8 DD8.8 R6.1 R7.1 R8.1 R9.1 R10.1 R11.1 R12.1 R13.1 R54.2 SA4.3 SA5.3 SA6.3 SA7.3 SA8.3 SA9.3 SA10.3 SA11.3 VD11.2 VD12.2 VD13.2 VD14.2 VD15.2 VD16.2 VD17.2 VD18.2 VD20.2 VD21.2 VD22.2 VD23.2 VD24.2 XT1.20 XT3.30 XT3.31 XT3.32 XT3.39 XT3.40 | length 28.6
  Top Layer w0.25: v1(11.677,87.192) C1.1@11.677,88.519 ; v1(11.805,92.528) C2.1@11.805,93.855 ; v1(12.277,97.895) C3.2@12.277,99.972 ; VD20.2@77.292,34.867 v1(78.769,34.867) ; v1(121.312,40.539) DD5.8@122.514,40.539 ; DD6.8@127.94,85.275 v1(129.142,85.275) ; DD4.8@212.112,44.269 v1(213.314,44.269) ; v1(218.199,35.407) DD2.8@219.401,35.407 ; DD7.8@224.351,25.332 v1(225.553,25.332) ; DD8.8@224.351,63.261 v1(225.553,63.261) ; DD1.8@224.351,82.226 v1(226.569,82.226) ; DD3.8@224.351,101.19 v1(225.553,101.19) ; v1(233.587,33.365) R11.1@233.587,34.667 ; v1(233.6,49.678) R9.1@233.6,50.98 ; v1(233.61,38.619) R10.1@233.61,39.921 ; v1(233.617,54.817) R8.1@233.617,56.119 ; v1(233.689,73.555) R54.2@233.689,74.857 ; v1(233.706,61.179) R6.1@233.706,62.481 ; v1(233.709,20.075) R13.1@233.709,21.377 ; v1(233.709,26.41) R12.1@233.709,27.712 ; v1(236.907,79.376) R7.1@236.907,80.678
NetDA1_3: DA1.3 R15.2 | length 15.2
  Top Layer w0.25: DA1.3@158.59,95.447 165.573,95.447 168.292,98.166 R15.2@168.292,102.551
NetDA1_4: DA1.4 XT4.3 | length 129.3
  Top Layer w0.25: DA1.4@158.59,96.697 v1(160.059,96.697) ; v1(181.243,27.808) v1(181.243,87.142)
  Mid-Layer 1 w0.25: v1(160.059,96.697) 166.075,96.697 175.629,87.142 v1(181.243,87.142)
  Bottom Layer w0.25: XT4.3@148.981,3.819 149.881,4.719 149.881,6.675 171.014,27.808 v1(181.243,27.808)
NetDA1_6: DA1.6 XT4.4 | length 127.4
  Top Layer w0.25: DA1.6@158.59,99.197 v1(160.745,99.197)
  Mid-Layer 1 w0.25: v1(124.982,59.202) 124.982,50.439 142.99,32.431 142.99,5.456 143.346,5.1 150.24,5.1 XT4.4@151.521,3.819
  Bottom Layer w0.25: v1(124.982,59.202) 160.745,94.965 v1(160.745,99.197)
NetDA1_10: DA1.10 R17.2 | length 27.8
  Top Layer w0.25: DA1.10@146.09,97.947 147.553,97.947 v1(147.562,97.937) ; v1(168.263,87.65) 168.292,87.68 R17.2@168.292,88.974
  Mid-Layer 1 w0.25: v1(147.562,97.937) 157.849,87.65 v1(168.263,87.65)
NetDA1_11: DA1.11 XT4.1 | length 97.2
  Top Layer w0.25: v1(140.679,7.041) 140.679,71.481 140.639,71.521 140.639,73.615 141.847,74.823 141.847,93.695 144.848,96.697 DA1.11@146.09,96.697
  Mid-Layer 1 w0.25: v1(140.679,7.041) XT4.1@143.901,3.819
NetDA1_13: DA1.13 XT4.2 | length 94
  Top Layer w0.25: DA1.13@146.09,94.197 144.997,94.197 143.371,92.571 143.371,53.665 142.609,52.903 142.609,10.401 145.319,7.691 145.319,4.941 XT4.2@146.441,3.819
NetDA2_3: DA2.3 R19.2 | length 10.1
  Top Layer w0.25: DA2.3@158.59,74.252 162.98,74.252 163.861,75.132 R19.2@168.292,75.132
NetDA2_4: DA2.4 XT4.7 | length 89.9
  Top Layer w0.25: DA2.4@158.59,75.502 v1(160.059,75.502) ; XT4.7@159.141,3.819 160.059,4.737 160.059,25.598 165.977,31.516 171.514,31.516 175.248,35.25 175.248,61.234 v1(173.318,63.165)
  Mid-Layer 1 w0.25: v1(160.059,75.502) 172.396,63.165 v1(173.318,63.165)
NetDA2_6: DA2.6 XT4.8 | length 96.9
  Top Layer w0.25: DA2.6@158.59,78.002 169.606,78.002 169.609,77.998 169.609,72.588 175.858,66.34 175.858,34.564 172.294,31 168.001,31 160.77,23.769 160.77,4.73 XT4.8@161.681,3.819
NetDA2_10: DA2.10 R21.2 | length 30.3
  Top Layer w0.25: DA2.10@146.09,76.752 v1(152.414,76.752) ; R21.2@168.292,60.876 v1(168.292,63.518)
  Mid-Layer 1 w0.25: v1(152.414,76.752) 165.647,63.518 v1(168.292,63.518)
NetDA2_11: DA2.11 XT4.5 | length 98.6
  Top Layer w0.25: v1(141.314,72.207) 141.314,7.793 141.39,7.716 141.39,2.611 142.533,1.468 156.376,1.468 157.519,2.611 157.519,4.414 157.189,4.745 154.987,4.745 XT4.5@154.061,3.819 ; v1(144.616,75.509) 144.623,75.502 DA2.11@146.09,75.502
  Bottom Layer w0.25: v1(141.314,72.207) v1(144.616,75.509)
NetDA2_13: DA2.13 XT4.6 | length 85.3
  Top Layer w0.25: v1(142,70.378) 142,9.915 144.819,7.096 144.819,4.11 146.013,2.916 155.698,2.916 XT4.6@156.601,3.819 ; v1(144.616,72.994) 144.623,73.002 DA2.13@146.09,73.002
  Bottom Layer w0.25: v1(142,70.378) v1(144.616,72.994)
NetDA3_3: DA3.3 R23.2 | length 26.1
  Top Layer w0.25: DA3.3@146.59,55.26 148.065,55.26 v1(148.07,55.265) ; v1(160.008,46.807) 168.292,46.807 R23.2@168.292,47.73
  Mid-Layer 1 w0.25: v1(148.07,55.265) 151.55,55.265 v1(160.008,46.807)
NetDA3_4: DA3.4 XT4.11 | length 51.6
  Top Layer w0.25: XT4.11@146.441,6.359 146.441,7.843 143.117,11.166 143.117,52.395 144.732,54.01 DA3.4@146.59,54.01
NetDA3_6: DA3.6 XT4.12 | length 49.2
  Top Layer w0.25: DA3.6@146.59,51.51 145.505,51.51 143.625,49.631 143.625,11.715 XT4.12@148.981,6.359
NetDA3_10: DA3.10 R25.2 | length 28.7
  Top Layer w0.25: DA3.10@159.09,52.76 166.984,52.76 169.279,50.465 169.279,46.197 167.298,44.216 167.298,38.127 168.473,36.952 R25.2@168.473,34.18
NetDA3_11: DA3.11 XT4.9 | length 59.3
  Top Layer w0.25: v1(156.935,54.01) DA3.11@159.09,54.01
  Mid-Layer 1 w0.25: v1(156.935,54.01) 168.974,41.971 168.974,8.572 XT4.9@164.221,3.819
NetDA3_13: DA3.13 XT4.10 | length 64.4
  Top Layer w0.25: v1(157.621,56.51) DA3.13@159.09,56.51
  Mid-Layer 1 w0.25: XT4.10@143.901,6.359 143.901,54.982 145.429,56.51 v1(157.621,56.51)
NetDA4_3: DA4.3 R27.2 | length 20.3
  Top Layer w0.25: v1(157.113,31.872) 157.123,31.861 DA4.3@158.59,31.861 ; v1(168.289,18.969) 168.292,18.973 R27.2@168.292,20.277
  Mid-Layer 1 w0.25: v1(157.113,31.872) 157.113,30.145 v1(168.289,18.969)
NetDA4_4: DA4.4 XT4.15 | length 31.1
  Top Layer w0.25: XT4.15@156.601,6.359 154.522,8.438 154.522,32.075 155.558,33.111 DA4.4@158.59,33.111